# Altium PCB Altium.pcbdoc
Units mil, origin at the board's own origin, x right, y up, seen from the top; angles counter-clockwise.
Board outline 4549.99 x 2275 mil, 2 copper layers (Top Layer, Bottom Layer); 28 components, 22 nets, 77 pads, 0 vias.
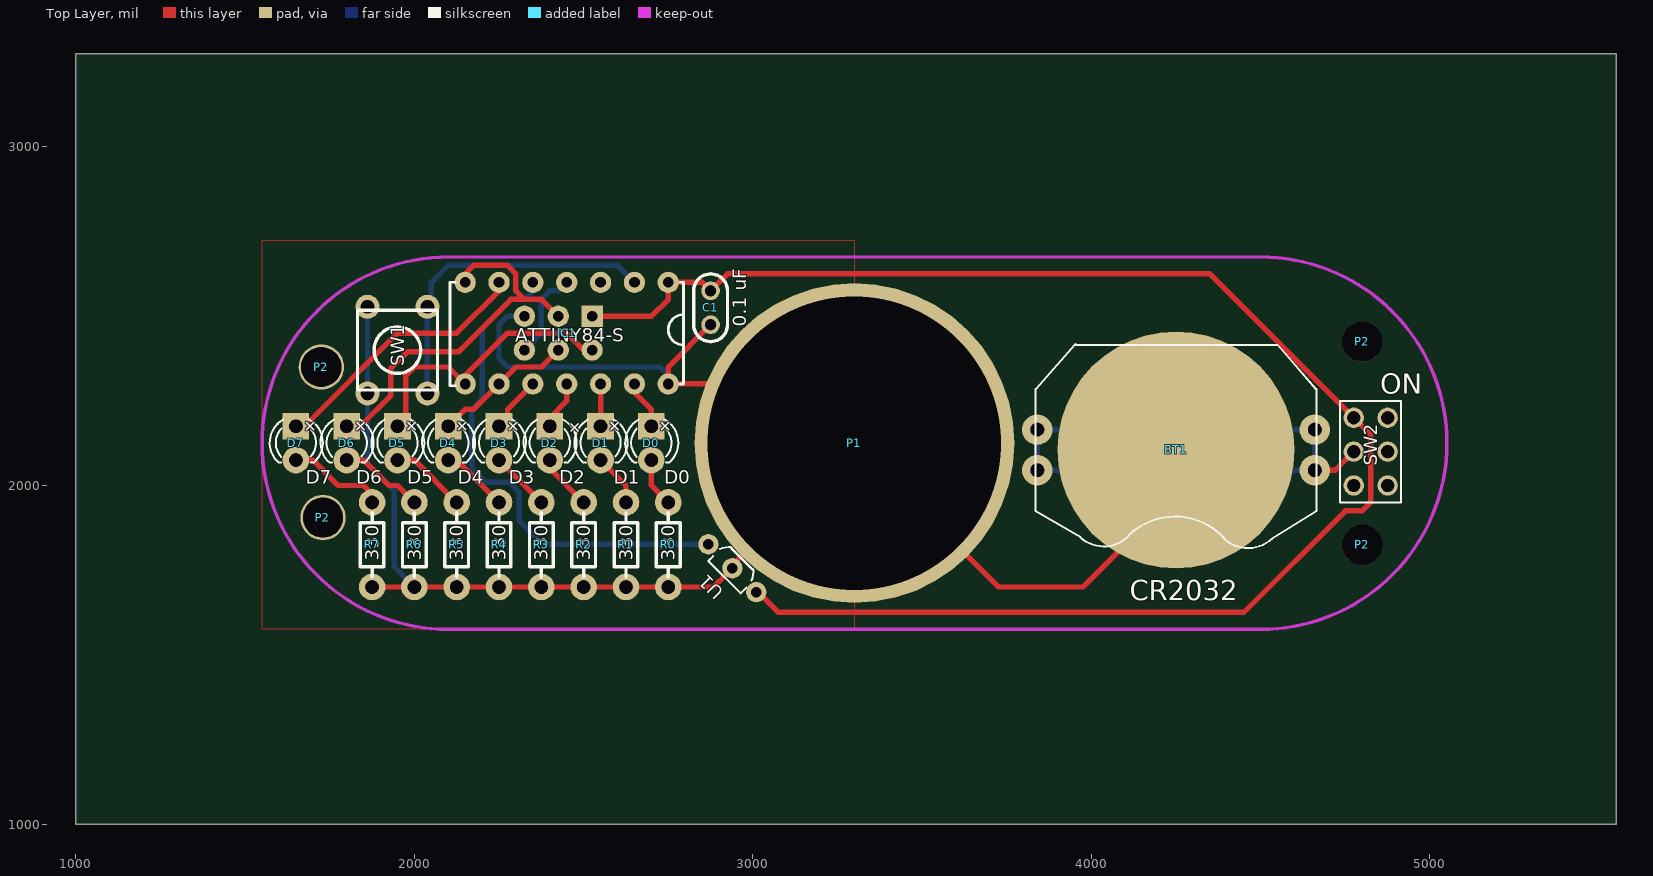
[diagram p0: Top Layer view]
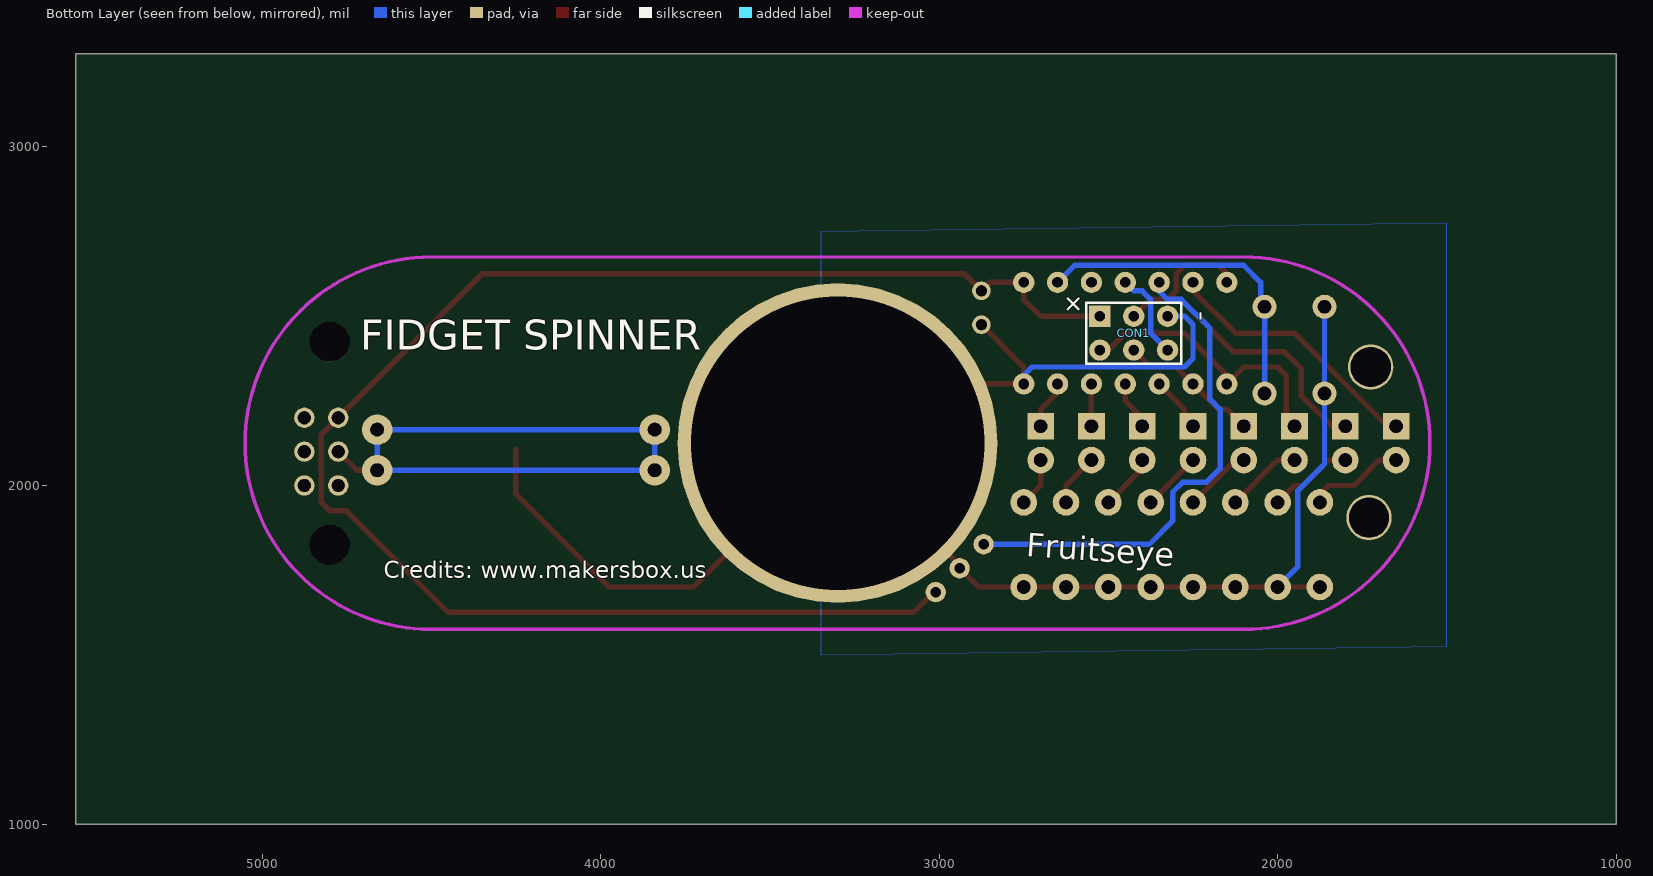
[diagram p1: Bottom Layer view, seen from below]

## Layer stack, top to bottom
Top Layer: signal copper (thickness not stored)
Dielectric: dielectric 12.6, FR-4, Dk 4.8
Bottom Layer: signal copper (thickness not stored)

## Board outline
5549.99,1000 1000,1000 1000,3275 5549.99,3275

## Components (designator, comment, footprint, x,y, rotation, side; value= is the part's Value field where it differs from the comment)
BT1 "Battery" BATT_CR2032 -4699.99,5374.99 r0 top
C1 "0.1 uF" C1 -4699.99,5374.99 r0 top
CON1 "AVR-ISP-6" AVR-ISP-6 -4699.99,5374.99 r0 bottom
D0 "LED" LED-3MM#1 -4699.99,5374.99 r0 top
D1 "LED" LED-3MM#2 -4699.99,5374.99 r0 top
D2 "LED" LED-3MM#3 -4699.99,5374.99 r0 top
D3 "LED" LED-3MM#4 -4699.99,5374.99 r0 top
D4 "LED" LED-3MM#5 -4699.99,5374.99 r0 top
D5 "LED" LED-3MM#6 -4699.99,5374.99 r0 top
D6 "LED" LED-3MM#7 -4699.99,5374.99 r0 top
D7 "LED" LED-3MM#8 -4699.99,5374.99 r0 top
IC1 "ATTINY84-S" DIP-14_W7.62MM -4699.99,5374.99 r0 top
P1 "CONN_01X01" PIN_HEADER_STRAIGHT_1X01 -4699.99,5374.99 r0 top
P2 "CONN_01X01" LEGO_DRILL#1 -4699.99,5374.99 r0 top
P2 "CONN_01X01" LEGO_DRILL#2 -4699.99,5374.99 r0 top
P2 "CONN_01X01" LEGO_DRILL#3 -4699.99,5374.99 r0 top
P2 "CONN_01X01" LEGO_DRILL#4 -4699.99,5374.99 r0 top
R0 "330" RESISTOR_HORZ#1 -4699.99,5374.99 r0 top
R1 "330" RESISTOR_HORZ#2 -4699.99,5374.99 r0 top
R2 "330" RESISTOR_HORZ#3 -4699.99,5374.99 r0 top
R3 "330" RESISTOR_HORZ#4 -4699.99,5374.99 r0 top
R4 "330" RESISTOR_HORZ#5 -4699.99,5374.99 r0 top
R5 "330" RESISTOR_HORZ#6 -4699.99,5374.99 r0 top
R6 "330" RESISTOR_HORZ#7 -4699.99,5374.99 r0 top
R7 "330" RESISTOR_HORZ#8 -4699.99,5374.99 r0 top
SW1 "SW_PUSH" SW_PUSH_SMALL -4699.99,5374.99 r0 top
SW2 "SPDT" MYSWITCHDPDT -4699.99,5374.99 r0 top
U1 "MLX92231" TO-92_INLINE_WIDE -4699.99,5374.99 r0 top

## Footprints (in the part's own frame and the unit in brackets; to place one, negate y for a bottom-side part, rotate by r counter-clockwise, add the part's x,y. Pads: shape width x height; smd on the part's side, far side on the other; paste and mask are expansions set on the pad)
AVR-ISP-6 [mil]
  round 62.99 hole 30 slot 30.2 at 90 deg: 1(7224.99,2974.99) 3(7124.99,2974.99) 4(7124.99,2874.99) 5(7024.99,2974.99) 6(7024.99,2874.99)
  rect 62.99x62.99 hole 30 slot 30.2 at 90 deg: 2(7224.99,2874.99)
  silkscreen extent 6985,2835 7265,3015
BATT_CR2032 [mil]
  round 90 hole 40 slot 40.2 at 0 deg: 1(8539.98,-3329.99) 1(8539.98,-3209.99) 1(9359.98,-3329.99) 1(9359.98,-3209.99)
  round 700 smd: 2(8949.98,-3269.99)
  silkscreen extent 8535,-3560 9365,-2957
C1 [mil]
  round 55 hole 32 slot 32.2 at 90 deg: 1(7574.98,-2799.99) 2(7574.98,-2899.99)
  silkscreen extent 7525,-2950 7625,-2750
DIP-14_W7.62MM [mil]
  round 62.99 hole 31.5: 1(7449.99,-2774.99) 2(7349.99,-2774.99) 3(7249.99,-2774.99) 4(7149.99,-2774.99) 5(7049.99,-2774.99) 6(6949.99,-2774.99) 7(6849.99,-2774.99) 8(6849.99,-3074.99) 9(6949.99,-3074.99) 10(7049.99,-3074.99) 11(7149.99,-3074.99) 12(7249.99,-3074.99) 13(7349.99,-3074.99) 14(7449.99,-3074.99)
  silkscreen extent 6805,-3080 7495,-2775
LED-3MM#1 [mm]
  round 2 hole 1.001 slot 1.006 at 0 deg: 1(187.96,-83.82)
  rect 2x2 hole 1.001 slot 1.006 at 90 deg: 2(187.96,-81.28)
  silkscreen extent 186,-84.02 189.98,-80.77
LED-3MM#2 [mm]
  round 2 hole 1.001 slot 1.006 at 0 deg: 1(184.15,-83.82)
  rect 2x2 hole 1.001 slot 1.006 at 90 deg: 2(184.15,-81.28)
  silkscreen extent 182.19,-84.02 186.17,-80.77
LED-3MM#3 [mm]
  round 2 hole 1.001 slot 1.006 at 0 deg: 1(180.34,-83.82)
  rect 2x2 hole 1.001 slot 1.006 at 90 deg: 2(180.34,-81.28)
  silkscreen extent 178.38,-84.02 182.36,-80.77
LED-3MM#4 [mm]
  round 2 hole 1.001 slot 1.006 at 0 deg: 1(176.53,-83.82)
  rect 2x2 hole 1.001 slot 1.006 at 90 deg: 2(176.53,-81.28)
  silkscreen extent 174.57,-84.02 178.55,-80.77
LED-3MM#5 [mm]
  round 2 hole 1.001 slot 1.006 at 0 deg: 1(172.72,-83.82)
  rect 2x2 hole 1.001 slot 1.006 at 90 deg: 2(172.72,-81.28)
  silkscreen extent 170.76,-84.02 174.74,-80.77
LED-3MM#6 [mm]
  round 2 hole 1.001 slot 1.006 at 0 deg: 1(168.91,-83.82)
  rect 2x2 hole 1.001 slot 1.006 at 90 deg: 2(168.91,-81.28)
  silkscreen extent 166.95,-84.02 170.93,-80.77
LED-3MM#7 [mm]
  round 2 hole 1.001 slot 1.006 at 0 deg: 1(165.1,-83.82)
  rect 2x2 hole 1.001 slot 1.006 at 90 deg: 2(165.1,-81.28)
  silkscreen extent 163.14,-84.02 167.12,-80.77
LED-3MM#8 [mm]
  round 2 hole 1.001 slot 1.006 at 0 deg: 1(161.29,-83.82)
  rect 2x2 hole 1.001 slot 1.006 at 90 deg: 2(161.29,-81.28)
  silkscreen extent 159.33,-84.02 163.31,-80.77
LEGO_DRILL#1 [mm]
  round 3 hole 3 slot 3 at 0 deg: 1(241.299,-90.17)
LEGO_DRILL#2 [mm]
  round 3.4 hole 3 slot 3 at 0 deg: 1(163.195,-76.835)
LEGO_DRILL#3 [mm]
  round 3 hole 3 slot 3 at 0 deg: 1(241.299,-74.93)
LEGO_DRILL#4 [mm]
  round 3.4 hole 3 slot 3 at 0 deg: 1(163.322,-88.138)
MYSWITCHDPDT [mil]
  round 60 hole 38 slot 38.2 at 90 deg: 1(9474.98,-3174.99) 2(9474.98,-3274.99) 3(9474.98,-3374.99) 4(9574.98,-3374.99) 5(9574.98,-3274.99) 6(9574.98,-3174.99)
  silkscreen extent 9435,-3425 9615,-3125
PIN_HEADER_STRAIGHT_1X01 [mil]
  round 944.88 hole 867.12: 1(7999.98,-3249.99)
RESISTOR_HORZ#1 [mil]
  round 78.7 hole 39.4 slot 39.6 at 90 deg: 1(7449.99,-3424.99) 2(7449.99,-3674.99)
  silkscreen extent 7415,-3645 7485,-3455
RESISTOR_HORZ#2 [mil]
  round 78.7 hole 39.4 slot 39.6 at 90 deg: 1(7324.99,-3424.99) 2(7324.99,-3674.99)
  silkscreen extent 7290,-3645 7360,-3455
RESISTOR_HORZ#3 [mil]
  round 78.7 hole 39.4 slot 39.6 at 90 deg: 1(7199.99,-3424.99) 2(7199.99,-3674.99)
  silkscreen extent 7165,-3645 7235,-3455
RESISTOR_HORZ#4 [mil]
  round 78.7 hole 39.4 slot 39.6 at 90 deg: 1(7074.99,-3424.99) 2(7074.99,-3674.99)
  silkscreen extent 7040,-3645 7110,-3455
RESISTOR_HORZ#5 [mil]
  round 78.7 hole 39.4 slot 39.6 at 90 deg: 1(6949.99,-3424.99) 2(6949.99,-3674.99)
  silkscreen extent 6915,-3645 6985,-3455
RESISTOR_HORZ#6 [mil]
  round 78.7 hole 39.4 slot 39.6 at 90 deg: 1(6824.99,-3424.99) 2(6824.99,-3674.99)
  silkscreen extent 6790,-3645 6860,-3455
RESISTOR_HORZ#7 [mil]
  round 78.7 hole 39.4 slot 39.6 at 90 deg: 1(6699.99,-3424.99) 2(6699.99,-3674.99)
  silkscreen extent 6665,-3645 6735,-3455
RESISTOR_HORZ#8 [mil]
  round 78.7 hole 39.4 slot 39.6 at 90 deg: 1(6574.99,-3424.99) 2(6574.99,-3674.99)
  silkscreen extent 6540,-3645 6610,-3455
SW_PUSH_SMALL [mil]
  round 70.87 hole 39.36: 1(6738.57,-3102.95) 1(6738.57,-2847.04) 2(6561.4,-3102.95) 2(6561.4,-2847.04)
  silkscreen extent 6532,-3093 6768,-2857
TO-92_INLINE_WIDE [mil]
  round 60 hole 31.5: 1(7709.98,-3689.99) 2(7639.27,-3619.28) 3(7568.56,-3548.57)
  silkscreen extent 7569,-3694 7702,-3556

## Nets (pads, with @x,y where several pads share a name; then routed paths per layer and width w, separated by ;. In a path a pad name is that pad's centre, name@x,y a point inside that pad or via, vN(x,y) a via of type N, cw(c..) or ccw(c..) an arc to the next point about the centre after c; other vN are vias at no path point)
+BATT: C1.1 CON1.2 IC1.1 SW2.1 U1.1 | length 4778.8
  Top Layer w16: CON1.2 2700,2500 2750,2550 IC1.1 2849.99,2600 C1.1 2924.99,2625 4249.99,2625 4349.99,2625 SW2.1 4824.99,2150 4824.99,1950 4799.99,1925 4749.99,1925 4449.99,1625 4324.99,1625 3074.99,1625 3024.99,1675 U1.1@2999.99,1675
GND: BT1.2 C1.2 CON1.6 IC1.14 P1.1 R0.2 R1.2 R2.2 R3.2 R4.2 R5.2 R6.2 R7.2 SW1.2 U1.2 | length 5437
  Top Layer w16: R7.2@1880,1700 R6.2 R5.2 R4.2 R3.2 R2.2 R1.2 R0.2 2884.11,1700 2923.39,1739.28 2923.39,1748.39 P1.1 ; C1.2 2750,2350 IC1.14 3124.99,2300 P1.1 ; BT1.2 4249.99,1975 3974.99,1700 3724.99,1700 P1.1
  Bottom Layer w16: SW1.2@1861.41,2527.95 1861.41,2272.04 1861.41,2063.58 1940,1985 1940,1760 R6.2 ; CON1.6 2275,2500 2250,2475 2250,2375 2275,2350 2725,2350 2750,2325 IC1.14
NET-(BT1-PAD1): BT1.1 SW2.2 | length 2017.8
  Top Layer w16: BT1.1@4659.99,2045 4719.99,2045 SW2.2
  Bottom Layer w16: BT1.1@3839.99,2045 4659.99,2045 4659.99,2165 3839.99,2165 BT1.1@3839.99,2045
NET-(CON1-PAD1): CON1.1 D5.2 IC1.8 | length 873.9
  Top Layer w16: D5.2@1950,2185 D5.2 1975,2200 1975,2325 2000,2350 2100,2350 IC1.8 ; CON1.1 2500,2400 2450,2450 2275,2450 IC1.8@2150,2325 ; IC1.8 IC1.8@2150,2325 ; IC1.8 IC1.8@2150,2325
NET-(CON1-PAD3): CON1.3 D4.2 IC1.9 | length 418.2
  Top Layer w16: D4.2 2150,2225 2175,2225 IC1.9 2300,2350 2375,2350 CON1.3
NET-(CON1-PAD4): CON1.4 D6.2 IC1.7 | length 1129
  Top Layer w16: D6.2 1840,2175 1930,2265 1930,2345 1980,2395 2130,2395 2285,2550 2325,2550 ; IC1.7 2150,2625 2175,2650 2275,2650 2300,2625 2300,2575 2325,2550 ; CON1.4 2375,2550 2325,2550
NET-(CON1-PAD5): CON1.5 IC1.4 | length 276.4
  Bottom Layer w16: CON1.5 2375,2450 2375,2525 2375,2550 2400,2575 2425,2575 IC1.4 IC1.4@2450,2590
NET-(D0-PAD1): D0.1 R0.1 | length 145.7
  Top Layer w16: D0.1 2700,2000 R0.1
NET-(D0-PAD2): D0.2 IC1.13 | length 145.7
  Top Layer w16: IC1.13 2650,2275 2700,2225 D0.2
NET-(D1-PAD1): D1.1 R1.1 | length 156.1
  Top Layer w16: D1.1 2625,2000 R1.1
NET-(D1-PAD2): D1.2 IC1.12 | length 125
  Top Layer w16: D1.2 IC1.12
NET-(D2-PAD1): D2.1 R2.1 | length 166.4
  Top Layer w16: D2.1 2400,2050 R2.1
NET-(D2-PAD2): D2.2 IC1.11 | length 145.7
  Top Layer w16: D2.2 2400,2200 2450,2250 IC1.11
NET-(D3-PAD1): D3.1 R3.1 | length 176.8
  Top Layer w16: D3.1 R3.1
NET-(D3-PAD2): D3.2 IC1.10 | length 166.4
  Top Layer w16: D3.2 2275,2200 2275,2225 IC1.10
NET-(D4-PAD1): D4.1 R4.1 | length 201.8
  Top Layer w16: D4.1 2125,2075 R4.1
NET-(D5-PAD1): D5.1 R5.1 | length 226.8
  Top Layer w16: D5.1 2000,2075 R5.1
NET-(D6-PAD1): D6.1 R6.1 | length 251.8
  Top Layer w16: D6.1 1850,2075 1925,2000 1950,2000 R6.1
NET-(D7-PAD1): D7.1 R7.1 | length 293.5
  Top Layer w16: D7.1 1700,2075 1775,2000 1850,2000 1880,1970 R7.1@1880,1950
NET-(D7-PAD2): D7.2 IC1.6 | length 820.7
  Top Layer w16: IC1.6@2250,2595 IC1.6 2250,2575 2125,2450 1950,2450 D7.2@1675,2175 ; D7.2@1675,2175 D7.2 D7.2@1675,2175
NET-(IC1-PAD2): IC1.2 SW1.1 | length 990.3
  Top Layer w16: SW1.1@2038.58,2527.95 SW1.1@2050,2539.37
  Bottom Layer w16: SW1.1@2038.58,2272.04 2038.58,2527.95 2050,2539.37 2050,2600 2100,2650 2600,2650 IC1.2
NET-(IC1-PAD5): IC1.5 U1.3 | length 1489
  Bottom Layer w16: IC1.5 2350,2575 2325,2550 2285,2550 2200,2465 2200,2255 2170,2225 2170,2050 2210,2010 2280,2010 2310,1980 2310,1895 2378.57,1826.42 U1.3
pads on no net: IC1.3 P2.1 SW2.3 SW2.4 SW2.5 SW2.6

## Polygon pours and split planes (outlines as drawn)
GND on Top Layer (solid): 3299.99,1575 1550,1575 1550,2725 3299.99,2725
GND on Bottom Layer (solid): 3349.99,1500 1500,1525 1500,2775 3349.99,2750

## Keep-outs
Keep-Out Layer:
  lines w10: 2100,1575 cw(c2100,2125) 1550,2125 cw(c2100,2125) 2100,2675 ; 4499.99,1575 ccw(c4499.99,2125) 5049.99,2125 ccw(c4499.99,2125) 4499.99,2675

## Silkscreen, mask and mechanical layers (free items; w line width, h text height)
Top Overlay:
  text "ON" at 4852.75,2270.47 h59.05
  text "D7" at 1678.5,2005.32 h39.37
  text "D6" at 1828.5,2005.32 h39.37
  text "D5" at 1978.5,2005.32 h39.37
  text "D4" at 2128.5,2005.32 h39.37
  text "D3" at 2278.5,2005.32 h39.37
  text "D2" at 2428.5,2005.32 h39.37
  text "D1" at 2588.5,2005.32 h39.37
  text "D0" at 2738.5,2005.32 h39.37
  text "CR2032" at 4113.26,1660.47 h59.05
Bottom Overlay:
  text "-" at 2249.53,2514.99 h59.05 r90
  text "+" at 2609.13,2494.11 h59.05 r315
  text "FIDGET SPINNER" at 4710.01,2400.7 h88.58
  text "Fruitseye" at 2743.34,1790.63 h68.9 r4
  text "Credits: www.makersbox.us" at 4639.95,1725.39 h49.21
Document:
  lines w10: 4249.99,2125 4299.99,2125 4349.99,2125 ; 4299.99,2075 4299.99,2175 ; 4499.99,2025 4499.99,2225

## Text inside footprints (layer, text, board x,y; h text height)
D0: Top Overlay "+" at 2746.08,2203.17 h39.37 r225
D1: Top Overlay "+" at 2596.08,2203.17 h39.37 r225
D2: Top Overlay "+" at 2446.08,2175.33 h39.37 r315
D3: Top Overlay "+" at 2296.08,2203.17 h39.37 r225
D4: Top Overlay "+" at 2146.08,2203.17 h39.37 r225
D5: Top Overlay "+" at 1996.08,2203.17 h39.37 r225
D6: Top Overlay "+" at 1846.08,2203.17 h39.37 r225
D7: Top Overlay "+" at 1696.08,2203.17 h39.37 r225